# Altium PCB PCB1.PcbDoc
Units mm, origin at the board's own origin, x right, y up, seen from the top; angles counter-clockwise.
Board outline 89.97 x 121.9 mm, 2 copper layers (Top Layer, Bottom Layer); 59 components, 87 nets, 300 pads, 57 vias.
Unrouted connection lines stored in the file: 2.
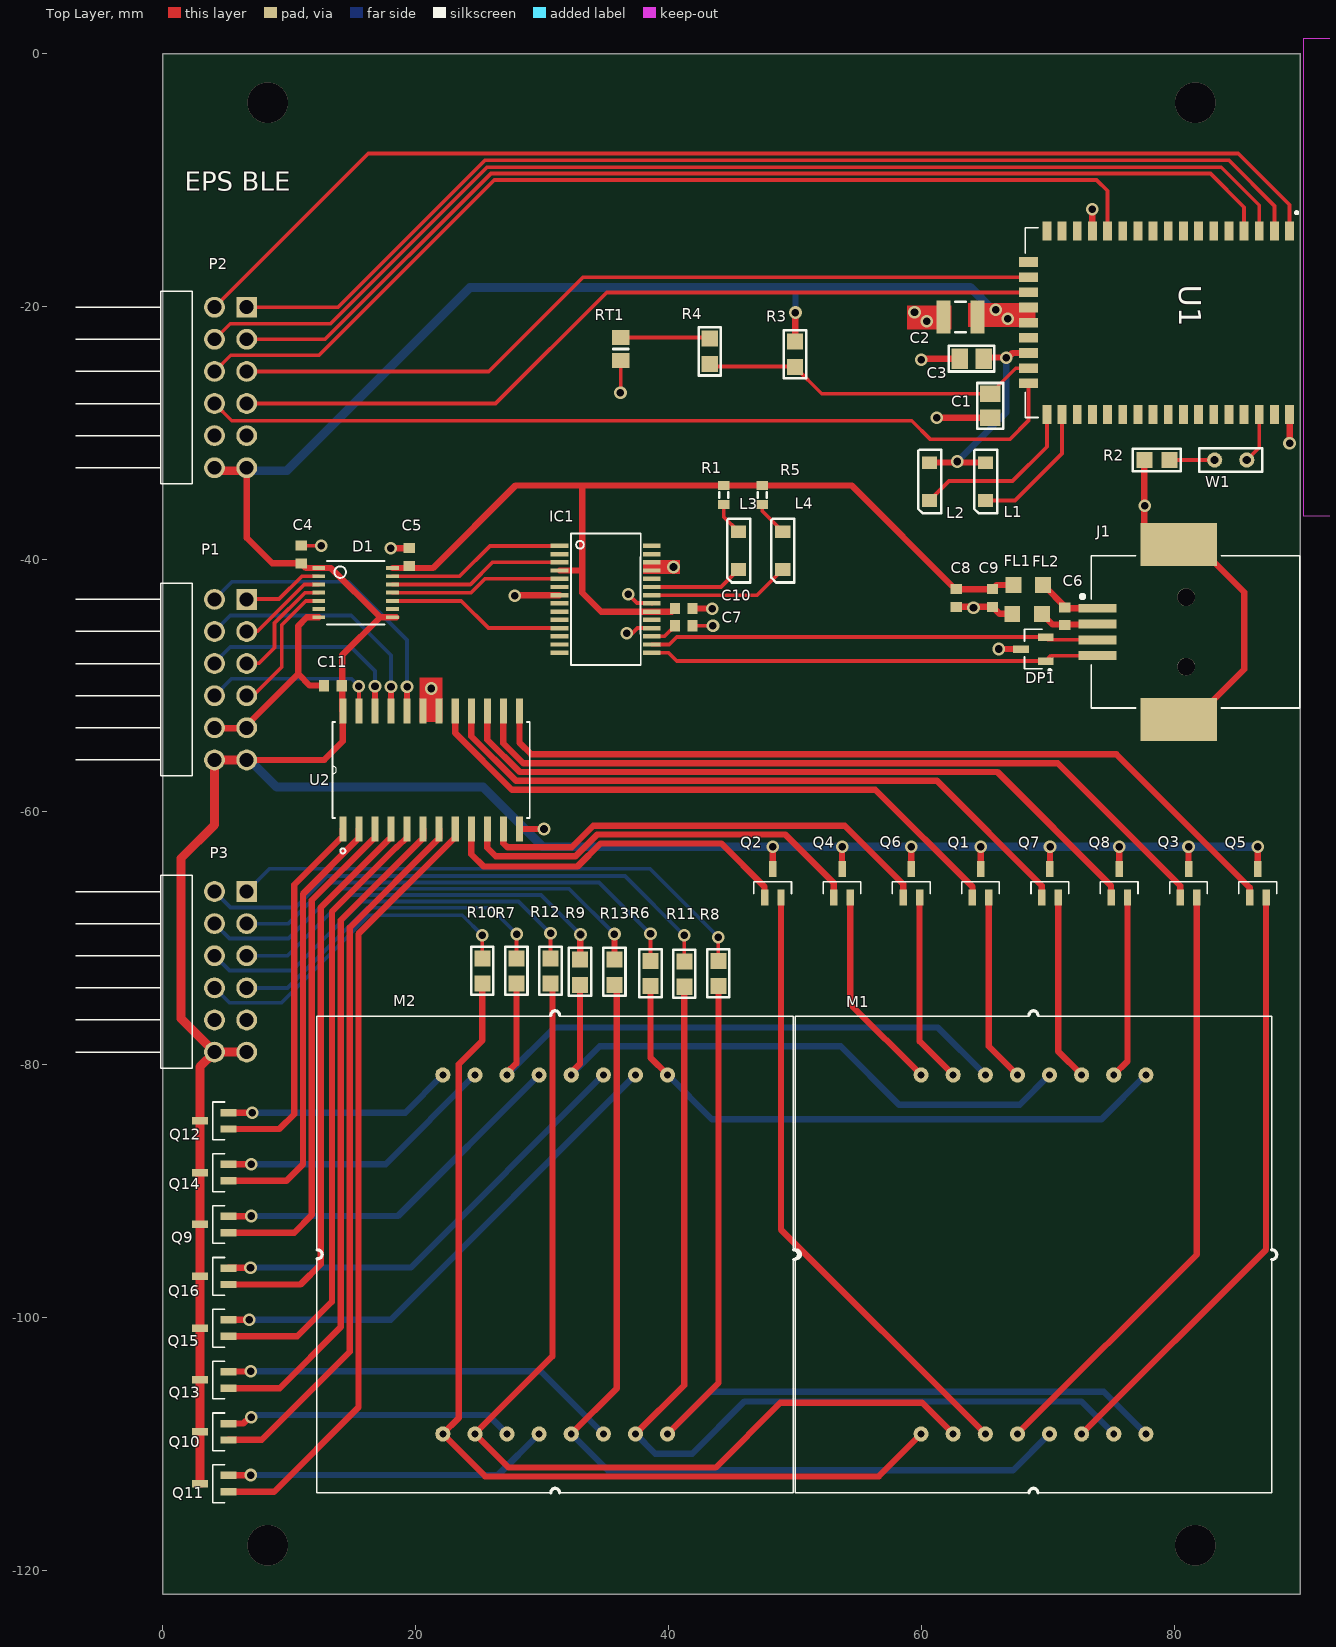
[diagram p0: Top Layer view]
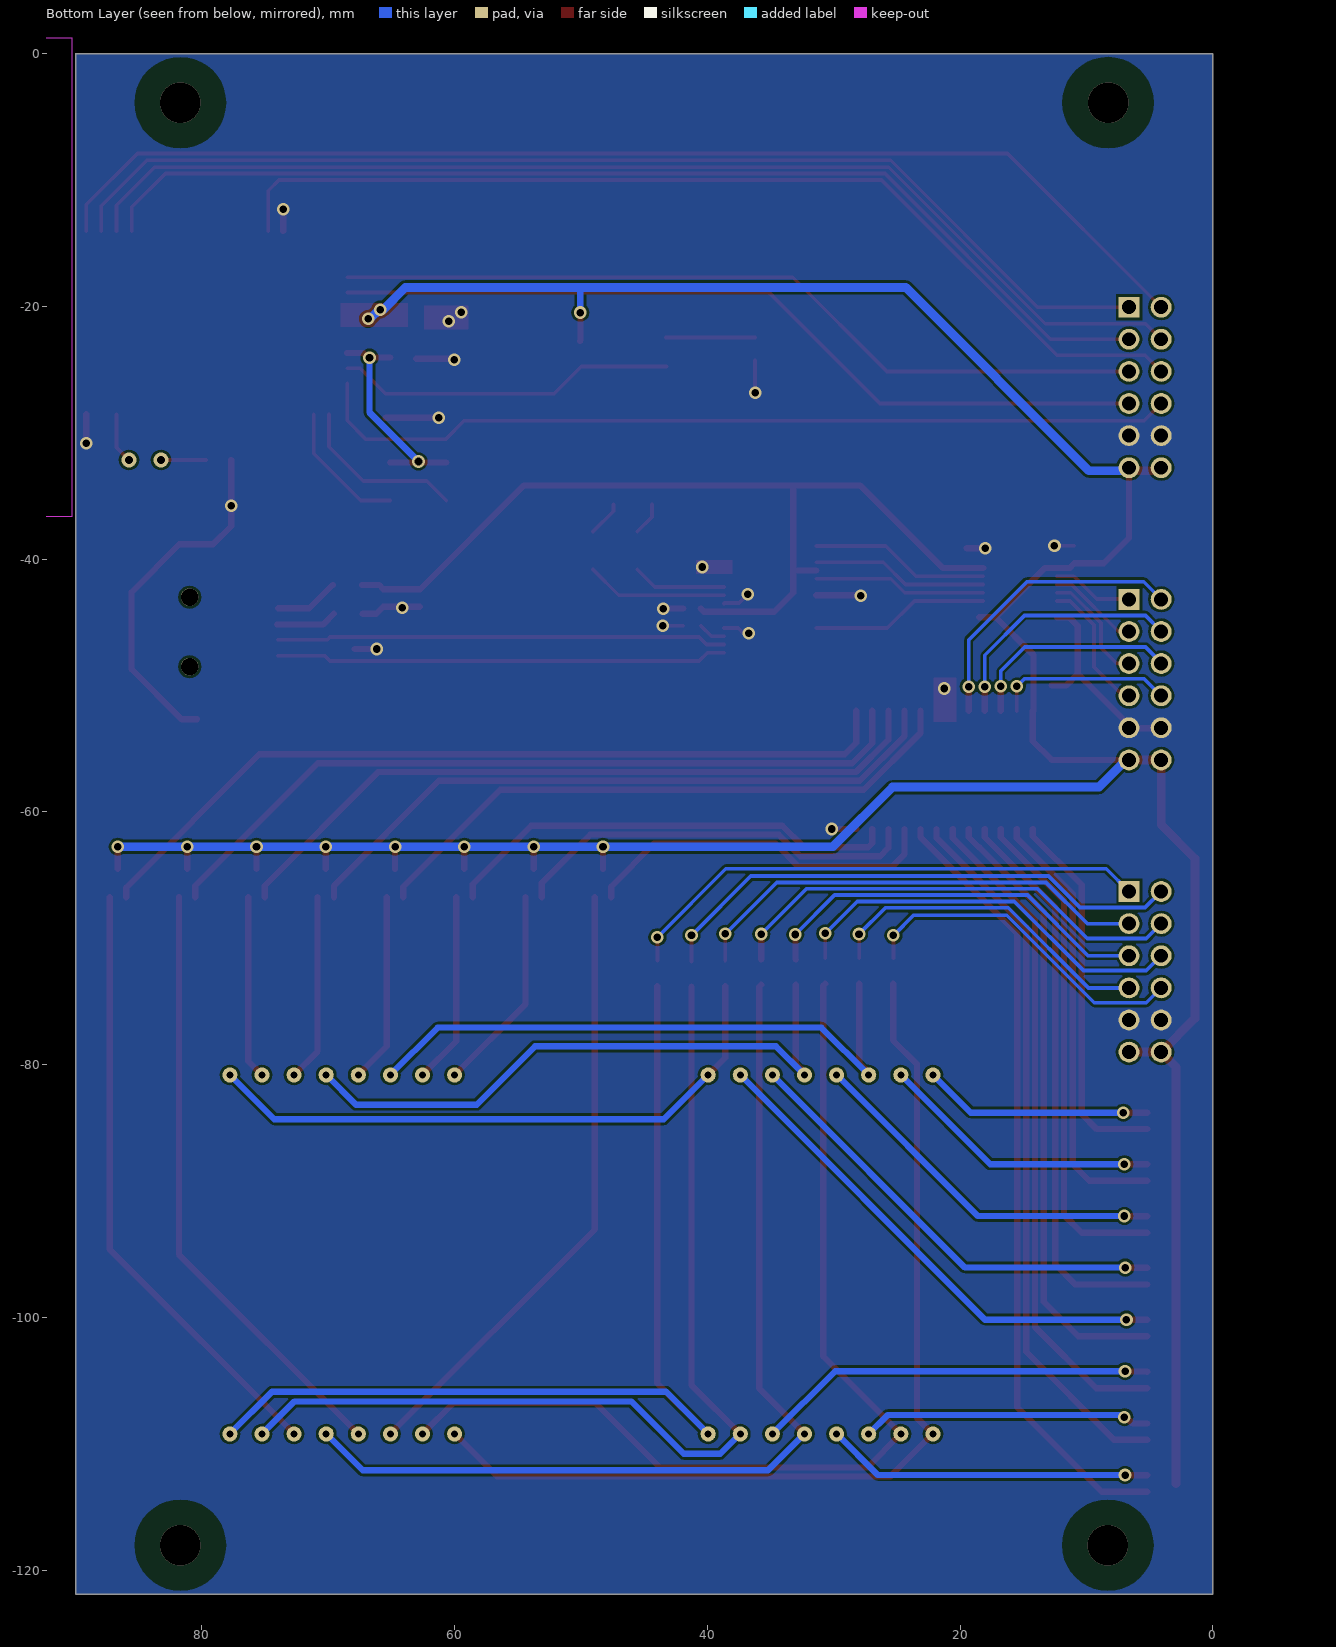
[diagram p1: Bottom Layer view, seen from below]

## Layer stack, top to bottom
Top Solder: solder mask 0.0102, Solder Resist, Dk 3.5
Top Layer: signal copper 0.0356
Dielectric 1: dielectric 0.32, FR-4, Dk 4.8
Bottom Layer: signal copper 0.0356
Bottom Solder: solder mask 0.0102, Solder Resist, Dk 3.5

## Board outline
0,-56.242 0,0 89.971,0 89.975,-0.004 89.975,-121.9 0.029,-121.9 0,-121.871
cut-out: 5.5,-121.925

## Design rules (kind name [scope] priority, off if disabled: settings)
Clearance Clearance_2 [InNamedPolygon('Ground') vs IsVia And AsMM(HoleDiameter) >= 3] p1: gap=0.254 ignorepadtopadclearanceinfootprint=FALSE except(0: Arc-Hole Track-Hole SMDPad-Hole THPad-Hole Via-Hole Fill-Hole Poly-Hole Region-Hole Text-Hole; 2: Via-Fill Via-Poly Via-Region)
Clearance Clearance_1 [OnLayer('Keep-Out Layer') vs OnLayer('Keep-Out Layer')] p2: gap=0 ignorepadtopadclearanceinfootprint=FALSE
Clearance [All And Not OnLayer('Keep-Out Layer') vs All And Not OnLayer('Keep-Out Layer')] p3: gap=0.2 ignorepadtopadclearanceinfootprint=FALSE
ComponentClearance ComponentClearance_1 [InComponent('M1') vs InComponent('M2')] p1: gap=-1 collisioncheckmode=3 verticalgap=0.254 showdistances=FALSE
ComponentClearance [All] p2: gap=0 collisioncheckmode=3 verticalgap=2540 showdistances=FALSE
HoleSize [All] p1: absolutevalues=TRUE maxlimit=3.2 minlimit=0.55 maxpercent=80.000 minpercent=20.000
MinimumSolderMaskSliver [All] p1: minsoldermaskwidth=0.05
PolygonConnect [All] p1: connectstyle=Direct reliefconductorwidth=0.5 reliefentries=4 polygonreliefangle="90 Angle" airgapwidth=0.2
RoutingVias [All] p1: holewidth=0.15 width=0.5 viastyle="Through Hole" minholewidth=0.1 minwidth=0.45 maxholewidth=0.25 maxwidth=0.6 viatemplateguid#1={1872E224-ECCF-4DE2-A86B-096BC1E742EF} viatemplatename#1=v127h71
SilkToSilkClearance [All] p1: silktosilkclearance=0.01
SilkToSolderMaskClearance [IsPad] p1: minsilkscreentomaskgap=0.01 clearancetoexposedcopper=TRUE
SolderMaskExpansion [All] p1: expansion=0.102
Width [All] p1: maxlimit=1 minlimit=0.3 preferedwidth=0.3 minimp=50.000000 maximp=50.000000 favimp=50.000000
25 further rules are at their usual default settings.

## Classes and differential pairs
net class "USB DATA": "D +" "D -"
net class UART: "CTS FT" "RTS FT" "RXD FT" "TXD FT"
net class "UART BM64": UART_RX UART_TX
net class "AUDIO I2S": ADCDAT BCLK DACDAT DACLRC
component class 3_DISPLAY: C11 M1 M2 P3 Q1 Q2 Q3 Q4 Q5 Q6 Q7 Q8 Q9 Q10 Q11 Q12 Q13 Q14 Q15 Q16 R6 R7 R8 R9 R10 R11 R12 R13 U2
component class 2_USB_UART: C4 C5 C6 C7 C8 C9 C10 D1 DP1 FL1 FL2 IC1 J1 L3 L4 P1 R1 R5
component class 1_BLE: C1 C2 C3 L1 L2 P2 R2 R3 R4 RT1 U1 W1

## Components (designator, comment, footprint, x,y, rotation, side; value= is the part's Value field where it differs from the comment)
C1 "1uF" Cap0805 65.454,-27.864 r90 top
C2 "Cap Semi" C1210 63.1,-20.846 r0 top value=22uF
C3 "0.1uF" Cap0805 63.979,-24.139 r180 top
C4 "Cap Semi" 1608[0603] 10.963,-39.631 r90 top value=100nF
C5 "Cap Semi" 1608[0603] 19.491,-39.826 r90 top value=100nF
C6 "Cap Semi" 1608[0603] 71.35,-44.519 r90 top value=10nF
C7 "Cap Semi" 1608[0603] 41.203,-45.275 r0 top value=100nF
C8 "Cap Semi" 1608[0603] 62.75,-43.069 r90 top value=10uF
C9 "Cap Semi" 1608[0603] 65.632,-43.069 r90 top value=100nF
C10 "Cap Semi" 1608[0603] 41.203,-43.903 r0 top value=100nF
C11 "Cap Semi" 1608[0603] 13.45,-50 r180 top value=100nF
D1 "TXB0104PWR" *TSSOP14 15.25,-42.65 r270 top
DP1 "PESD5V0U2BT,215" *SOT95P230X110-3N 68.865,-47.109 r180 top
FL1 "BLM21PG221SN1D" *BEADC2012X105N 68.464,-42.038 r0 top
FL2 "BLM21PG221SN1D" *BEADC2012X105N 68.374,-44.326 r0 top
IC1 "FT232RL" *SSOP28-LD 35.031,-43.175 r270 top
J1 "1-1734346-1" *TE_1-1734346-1_1-1734346-1(PRIMARY) 80.95,-45.752 r90 top
L1 "LED1" DIODE1206 65.077,-33.859 r90 top
L2 "LED1" DIODE1206 60.652,-33.859 r90 top
L3 "Led" "Diode1206 - PIN LETTER" 45.538,-39.321 r90 top
L4 "Led" "Diode1206 - PIN LETTER" 49.038,-39.321 r90 top
M1 "matrix8X8" "Matrix Led" 68.875,-95 r0 top
M2 "matrix8X8" "Matrix Led" 31.038,-95 r0 top
P1 "Pmod male" 901220766 0.275,-49.53 r270 top
P2 "Pmod male" 901220766 0.275,-26.416 r270 top
P3 "Pmod male" 901220766 0.275,-72.644 r270 top
Q1 "MOSFET-P" BSS84PWH6327XTSA1 64.046,-66.75 r90 top
Q2 "MOSFET-P" BSS84PWH6327XTSA1 47.6,-66.75 r90 top
Q3 "MOSFET-P" BSS84PWH6327XTSA1 80.493,-66.75 r90 top
Q4 "MOSFET-P" BSS84PWH6327XTSA1 53.082,-66.75 r90 top
Q5 "MOSFET-P" BSS84PWH6327XTSA1 85.975,-66.75 r90 top
Q6 "MOSFET-P" BSS84PWH6327XTSA1 58.564,-66.75 r90 top
Q7 "MOSFET-P" BSS84PWH6327XTSA1 69.529,-66.75 r90 top
Q8 "MOSFET-P" BSS84PWH6327XTSA1 75.011,-66.75 r90 top
Q9 "MOSFET-P" BSS84PWH6327XTSA1 5.183,-93.279 r180 top
Q10 "MOSFET-P" BSS84PWH6327XTSA1 5.183,-109.679 r180 top
Q11 "MOSFET-P" BSS84PWH6327XTSA1 5.183,-113.779 r180 top
Q12 "MOSFET-P" BSS84PWH6327XTSA1 5.183,-85.079 r180 top
Q13 "MOSFET-P" BSS84PWH6327XTSA1 5.183,-105.579 r180 top
Q14 "MOSFET-P" BSS84PWH6327XTSA1 5.183,-89.179 r180 top
Q15 "MOSFET-P" BSS84PWH6327XTSA1 5.183,-101.479 r180 top
Q16 "MOSFET-P" BSS84PWH6327XTSA1 5.183,-97.379 r180 top
R1 "270R" J1-0603 44.375,-34.925 r90 top value=270
R2 "Res3" "Resistor 0805" 78.648,-32.153 r180 top value=4K7
R3 "Res3" "RESISTOR 0805" 50.011,-23.797 r90 top value=1M
R4 "Res3" "RESISTOR 0805" 43.264,-23.544 r270 top value=86.6K
R5 "270R" J1-0603 47.425,-34.925 r90 top value=270
R6 "270R" "Resistor 0805" 38.575,-72.775 r90 top value=220
R7 "270R" "Resistor 0805" 27.971,-72.575 r90 top value=220
R8 "270R" "Resistor 0805" 43.95,-72.775 r90 top value=220
R9 "270R" "Resistor 0805" 33.004,-72.675 r90 top value=220
R10 "270R" "Resistor 0805" 25.275,-72.575 r90 top value=220
R11 "270R" "Resistor 0805" 41.25,-72.825 r90 top value=220
R12 "270R" "Resistor 0805" 30.668,-72.575 r90 top value=220
R13 "270R" "Resistor 0805" 35.725,-72.675 r90 top value=220
RT1 "Res Thermal" 6-0805_N 36.229,-23.374 r270 top
U1 "BM64SPKS1MC1-0001AA" *MODULE_BM64SPKS1MC1-0001AA 68.235,-13.793 r270 top
U2 "CD74HC154M" *SOIC127P1030X265-24N 21.225,-56.675 r90 top
W1 "Jumper" "SHUNT JUMPER" 83.208,-32.153 r0 top

## Footprints (in the part's own frame and the unit in brackets; to place one, negate y for a bottom-side part, rotate by r counter-clockwise, add the part's x,y. Pads: shape width x height; smd on the part's side, far side on the other; paste and mask are expansions set on the pad)
6-0805_N [mm] "Chip Resistor, Body 2.0x1.2mm, IPC Medium Density"
  rect 1.2x1.4 smd: 1(-0.9,0) 2(0.9,0)
  silkscreen extent 0,-0.6 0,0.6, body extent -1.07,-0.7 1.07,0.7, height 0.7
1608[0603] [mm] "Chip Capacitor, Body 1.6x0.8mm, IPC High Density"
  rect 0.8x0.9 smd: 1(-0.7,0) 2(0.7,0)
  body extent -0.87,-0.48 0.87,0.48, height 1.3
901220766 [mm]
  rect 1.65x1.65 hole 1.1: 1(-6.35,6.357)
  round 1.65 hole 1.1: 2(-3.81,6.357) 3(-1.27,6.357) 4(1.27,6.357) 5(3.81,6.357) 6(6.35,6.357) 7(-6.35,3.817) 8(-3.81,3.817) 9(-1.27,3.817) 10(1.27,3.817) 11(3.81,3.817) 12(6.35,3.817)
  silkscreen extent -7.62,-7.18 7.62,2.07, body extent -7.62,-7.7 7.62,6.15, height 3.08
*BEADC2012X105N [mm]
  rect 1.25x1.25 smd: 1(-1.175,0) 2(1.175,0)
*MODULE_BM64SPKS1MC1-0001AA [mm]
  rect 1.5x0.7 smd: 1(0.25,20.9) 2(0.25,19.7) 3(0.25,18.5) 4(0.25,17.3) 5(0.25,16.1) 6(0.25,14.9) 7(0.25,13.7) 8(0.25,12.5) 9(0.25,11.3) 10(0.25,10.1) 11(0.25,8.9) 12(0.25,7.7) 13(0.25,6.5) 14(0.25,5.3) 15(0.25,4.1) 16(0.25,2.9) 17(0.25,1.7) 27(14.75,1.7) 28(14.75,2.9) 29(14.75,4.1) 30(14.75,5.3) 31(14.75,6.5) 32(14.75,7.7) 33(14.75,8.9) 34(14.75,10.1) 35(14.75,11.3) 36(14.75,12.5) 37(14.75,13.7) 38(14.75,14.9) 39(14.75,16.1) 40(14.75,17.3) 41(14.75,18.5) 42(14.75,19.7) 43(14.75,20.9)
  rect 0.76x1.5 smd: 18(2.7,0.25) 19(3.9,0.25) 20(5.1,0.25) 21(6.3,0.25) 22(7.5,0.25) 23(8.7,0.25) 24(9.9,0.25) 25(11.1,0.25) 26(12.3,0.25)
  Keep-Out Layer region: -15,44 22.8,44 22.8,22 12.827,22 9.271,22 -15,22
  silkscreen extent -1.3,0 15,21.55
*SOIC127P1030X265-24N [mil]
  rect 78x22 smd: 1(-184,275) 2(-184,225) 3(-184,175) 4(-184,125) 5(-184,75) 6(-184,25) 7(-184,-25) 8(-184,-75) 9(-184,-125) 10(-184,-175) 11(-184,-225) 12(-184,-275) 13(184,-275) 14(184,-225) 15(184,-175) 16(184,-125) 17(184,-75) 18(184,-25) 19(184,25) 20(184,75) 21(184,125) 22(184,175) 23(184,225) 24(184,275)
  silkscreen extent -260,-307 150,307, body extent -204,-303 202,303, height 91
*SOT95P230X110-3N [mm]
  rect 1.26x0.59 smd: 1(-0.98,0.95) 2(-0.98,-0.95) 3(0.98,0)
  silkscreen extent -1.4,-1.56 0.7,1.8
*SSOP28-LD [mm]
  rect 0.348x1.397 smd: 1(-4.225,-3.656) 2(-3.575,-3.656) 3(-2.925,-3.656) 4(-2.275,-3.656) 5(-1.625,-3.656) 6(-0.975,-3.656) 7(-0.325,-3.656) 8(0.325,-3.656) 9(0.975,-3.656) 10(1.625,-3.656) 11(2.275,-3.656) 12(2.925,-3.656) 13(3.575,-3.656) 14(4.225,-3.656) 15(4.225,3.656) 16(3.575,3.656) 17(2.925,3.656) 18(2.275,3.656) 19(1.625,3.656) 20(0.975,3.656) 21(0.325,3.656) 22(-0.325,3.656) 23(-0.975,3.656) 24(-1.625,3.656) 25(-2.275,3.656) 26(-2.925,3.656) 27(-3.575,3.656) 28(-4.225,3.656)
  silkscreen extent -5.2,-2.75 5.2,2.78
*TE_1-1734346-1_1-1734346-1(PRIMARY) [mm]
  rect 0.7x3 smd: 1(1.87,7) 2(-0.63,7) 3(-1.88,7) 4(0.62,7)
  round 1.4 hole 1.4 unplated: None(-2.75,0) None(2.75,0)
  rect 3.4x6.04 smd: SH1(6.92,0.58) SH2(-6.92,0.58)
  silkscreen extent -6.02,-9 6.02,8.34, body extent -8.35,-8.83 8.15,8.27, height 11.2
*TSSOP14 [mil]
  rect 12x39 smd: 1(-76.77,-114.87) 2(-51.18,-114.87) 3(-25.59,-114.87) 4(0,-114.87) 5(25.59,-114.87) 6(51.18,-114.87) 7(76.77,-114.87) 8(76.77,114.87) 9(51.18,114.87) 10(25.59,114.87) 11(0,114.87) 12(-25.59,114.87) 13(-51.18,114.87) 14(-76.77,114.87)
  silkscreen extent -99,-90 99,90
BSS84PWH6327XTSA1 [mm]
  rect 1.26x0.59 smd: 1(0,0) 2(0,-1.3) 3(2.25,-0.65)
  silkscreen extent 0.3,-2.13 1.22,0.85
C1210 [mm] "Chip Capacitor, Body 3.2x2.5mm, IPC High Density"
  rect 1.1x2.6 smd: 1(-1.35,0) 2(1.35,0)
  silkscreen extent -0.4,-1.2 0.4,1.2, body extent -1.7,-1.35 1.7,1.35, height 1.3
Cap0805 [mm]
  rect 1.3x1.6 smd: 1(-0.95,0) 2(0.95,0)
  silkscreen extent -1.8,-1.02 1.8,1.02, body extent -1.4,-0.62 1.4,0.63, height 0.8
DIODE1206 [mm]
  rect 1x1.2 smd: 1(1.5,0) 2(-1.5,0)
  silkscreen extent -2.52,-0.92 2.52,0.9
"Diode1206 - PIN LETTER" [mm]
  rect 1x1.2 smd: A(1.5,0) K(-1.5,0)
  silkscreen extent -2.52,-0.92 2.52,0.9
J1-0603 [mm] "Chip Resistor, Body 1.6x0.8mm, IPC High Density"
  rect 0.7x0.9 smd: 1(-0.75,0) 2(0.75,0)
  silkscreen extent -0.2,-0.35 0.2,0.35, body extent -0.85,-0.48 0.85,0.48, height 0.9
"Matrix Led" [mm]
  round 1.2 hole 0.55: 1(-8.89,-14.2) 2(-6.35,-14.2) 3(-3.81,-14.2) 4(-1.27,-14.2) 5(1.27,-14.2) 6(3.81,-14.2) 7(6.35,-14.2) 8(8.89,-14.2) 9(-8.89,14.2) 10(-6.35,14.2) 11(-3.81,14.2) 12(-1.27,14.2) 13(1.27,14.2) 14(3.81,14.2) 15(6.35,14.2) 16(8.89,14.2)
  silkscreen extent -18.85,-18.85 19.24,19.27
"Resistor 0805" [mm]
  rect 1.27x1.27 smd: 1(-1,0) 2(1,0)
  silkscreen extent -1.88,-0.87 1.92,0.87
"RESISTOR 0805" [mm]
  rect 1.27x1.27 smd: 1(-1,0) 2(1,0)
  silkscreen extent -1.88,-0.87 1.92,0.87
"SHUNT JUMPER" [mm]
  round 1.2 hole 0.64: 1(0,0) 2(2.54,0)
  silkscreen extent -1.23,-0.92 3.77,0.92

## Part data
C1 C3: library part Cap, "capacitor", ASiD Part Number=C-AS, Volte=25v, ClassName=OutBuck
C2 C4 C5 C6 C7 C8 C9 C10 C11: "Capacitor (Semiconductor SIM Model)", LatestRevisionDate=29-May-2009, LatestRevisionNote="IPC-7351 Footprint Added.", PackageDescription="Chip Capacitor", PackageReference=C1206, Published=8-Jun-2000, Publisher="Altium Limited"
D1: "4-Bit Bidirectional Voltage-Level Shifter with Auto Direction Sensing and +/-15 kV ESD Protect 14-TSSOP -40 to 85", Package="TSSOP-14 Texas Instruments", Availability=Unavailable, Digi-KeyReference=296-21929-1-ND, MF="Texas Instruments", MP=TXB0104PWR, Price=None, SnapEDA_Link=https://www.snapeda.com/parts/TXB0104PWR/Texas%20Instruments/view-part/?ref=snap
DP1: "TVS DIODE 5V SOT23", Manufacturer 1=Nexperia, Supplier Part Number 1=1727-3936-1-ND, ComponentLink1Description=https://assets.nexperia.com/documents/data-sheet/PESD5V0U2BT.pdf?src-supplier=Digi-Key, ComponentLink1URL=https://assets.nexperia.com/documents/data-sheet/PESD5V0U2BT.pdf?src-supplier=Digi-Key, Digi-KeyReference=1727-3936-1-ND, Manufacturer Part Number 1=PESD5V0U2BT,215, Pricing 1="1=0,44000, 10=0,35300, 100=0,24020, 500=0,18012, 1000=0,13510 (USD)", RoHS=No, Stock 1=61061, Supplier 1=Digi-Key
FL1 FL2: "220 Ohms @ 100MHz 1 Power Line Ferrite Bead 0805 (2012 Metric) 2A 45mOhm", Package="2012 Murata", Digi-Key_Part_Number=490-1054-1-ND, MF=Murata, MP=BLM21PG221SN1D, SnapEDA_Link=https://www.snapeda.com/parts/BLM21PG221SN1D/Murata/view-part/12270/?ref=snap
IC1: "USB-to-UART 1-CH 256Byte FIFO 5V 28-Pin SSOP", Package="SSOP-28 FTDI, Future", Availability=Unavailable, Digi-KeyReference=768-1007-1-ND, MF="FTDI, Future", MP=FT232RL, Price=None, SnapEDA_Link=https://www.snapeda.com/parts/FT232RL/FTDI%2C%20Future%20Technology%20Devices%20International%20Ltd/view-part/?ref=snap
J1: "Conn USB 2.0 Type B RCP 4 POS 1.25mm Solder RA SMD 4 Terminal 1 Port T/R", Package=None, Digi-Key_Part_Number=A110862CT-ND, DigiKey-Purchase-URL=https://snapeda.com/shop?store=DigiKey&id=512451, EU_RoHS_Compliance=Compliant, MF="TE Connectivity", MP=1-1734346-1, SnapEDA_Link=https://www.snapeda.com/parts/1-1734346-1/TE%20Connectivity%20AMP%20Connectors/view-part/512451/?ref=snap
L1 L2: "Typical RED GaAs LED", Digi-KeyReference=732-13395-1-ND, LatestRevisionDate=08-Jul-2005, LatestRevisionNote="Mech Layer 1 removed.", PackageDescription="LED; 2 Leads", PackageReference=LED-1, Published=8-Jun-2000, Publisher="Altium Limited"
P1 P2 P3: "p mod male 6 position 2 rows"
Q1 Q2 Q3 Q4 Q5 Q6 Q7 Q8 Q9 Q10 Q11 Q12 Q13 Q14 Q15 Q16: "P-Channel MOSFET", Digi-KeyReference=BSS84PWH6327XTSA1CT-ND, LatestRevisionDate=17-Jul-2002, LatestRevisionNote="Re-released for DXP Platform.", PackageDescription="TO, Flat Index; 3 In-Line, Axial Leads; Body Dia. 4.6mm; Lead Dia. 0.5 mm (max)", PackageReference=E3, PackageVersion=1995/1996, Published=8-Jun-2000, Publisher="Altium Limited"
R1 R5 R6 R7 R8 R9 R10 R11 R12 R13: library part Res3, "Resistor", LatestRevisionDate=29-May-2009, LatestRevisionNote="IPC-7351 Footprint Added.", PackageDescription="Chip Resistor", PackageReference=J1-0603, Published=8-Jun-2000, Publisher="Altium Limited"
R2 R3 R4: "Resistor", LatestRevisionDate=29-May-2009, LatestRevisionNote="IPC-7351 Footprint Added.", PackageDescription="Chip Resistor", PackageReference=J1-0603, Published=8-Jun-2000, Publisher="Altium Limited"
RT1: "Thermistor", Code_IPC=RESC2012, Digi-KeyReference=BC2562CT-ND, LatestRevisionDate=29-May-2009, LatestRevisionNote="IPC-7351 Footprint Added.", PackageDescription="Chip Resistor 0805 Case Size", PackageReference=6-0805, PackageVersion=Mar-2003, Published=24-Mar-1999, Publisher="Altium Limited", R at 25=100k
U1: "Bluetooth Bluetooth v5.0 Transceiver Module 2.4GHz Integrated, Trace Surface Mount", Package="Module Microchip", Availability=Unavailable, MF=Microchip, MP=BM64SPKS1MC1-0001AA, Price=None, SnapEDA_Link=https://www.snapeda.com/parts/BM64SPKS1MC1-0001AA/Microchip/view-part/613145/?ref=snap
U2: "Decoder/Demultiplexer 1 x 4:16 24-SOIC", Package="SOIC-24 Texas Instruments", Availability=Unavailable, Digi-KeyReference=296-24352-2-ND, MF="Texas Instruments", MP=CD74HC154M, Price=None, SnapEDA_Link=https://www.snapeda.com/parts/CD74HC154M/Texas%20Instruments/view-part/231174/?ref=snap
W1: "Jumper Wire", Digi-KeyReferencer=S9000-ND, LatestRevisionDate=17-Jul-2002, LatestRevisionNote="Re-released for DXP Platform.", PackageDescription="Radial Cap, Thru-Hole; 2 Leads; 0.2 in Pin Spacing", PackageReference=RAD-0.2, Published=24-Mar-1999, Publisher="Altium Limited"
L3 L4: Digi-KeyReference=732-13395-1-ND

## Via types
v1: diameter 1, hole 0.6, Top Layer to Bottom Layer, 53 vias
v2: diameter 3.2, hole 3.2, Top Layer to Bottom Layer, 3 vias
v3: diameter 3.2/3.2 (per signal layer), hole 3.2, Top Layer to Bottom Layer, 1 vias

## Nets (pads, with @x,y where several pads share a name; then routed paths per layer and width w, separated by ;. In a path a pad name is that pad's centre, name@x,y a point inside that pad or via, vN(x,y) a via of type N, cw(c..) or ccw(c..) an arc to the next point about the centre after c; other vN are vias at no path point)
"3.3 VCC": C2.2 C4.1 C11.1 D1.1 D1.8 P1.6 P1.12 P2.6 P2.12 P3.6 P3.12 Q1.3 Q2.3 Q3.3 Q4.3 Q5.3 Q6.3 Q7.3 Q8.3 Q9.3 Q10.3 Q11.3 Q12.3 Q13.3 Q14.3 Q15.3 Q16.3 R3.2 U1.21 U1.22 U2.24 | length 273.9
  Top Layer w0.5: P1.6 12.762,-55.88 14.24,-54.402 U2.24 ; P2.6@6.632,-33 6.632,-38.32 8.644,-40.331 C4.1 11.329,-40.698 12.33,-40.698 D1.1 13.292,-40.7 17.184,-44.592 14.195,-47.581 14.195,-50 14.195,-52.015 U2.24@14.211,-52.031 ; 17.192,-44.6 D1.8 D1.8@18.472,-44.6 ; Q2.3 v1(48.25,-62.746) ; v1(50.044,-20.492) 50.027,-20.508 50.027,-22.702 R3.2@50.067,-22.741 ; Q4.3 v1@53.732,-62.847 ; Q6.3 v1@59.214,-62.979 ; Q1.3 v1@64.696,-63.07 ; Q7.3 70.182,-64.497 70.182,-62.749 v1(70.185,-62.746) ; Q8.3 v1@75.661,-62.905 ; Q3.3 v1@81.143,-63.06 ; Q5.3 v1(86.625,-62.746) v1@86.625,-62.737
  Top Layer w0.7: Q11.3 Q10.3 Q13.3 Q15.3 Q16.3 Q9.3 Q14.3 Q12.3 2.933,-80.153 P3.12 ; P2.12@4.092,-33 P2.6@6.632,-33 ; P3.6 P3.12 ; P1.6 P1.12 4.092,-61.014 1.429,-63.677 1.429,-76.331 P3.12
  Bottom Layer w0.5: v1(50.044,-20.492) 50.044,-18.623 50.17,-18.497
  Bottom Layer w0.7: P1.6@6.632,-55.86 6.846,-55.86 9.018,-58.031 25.349,-58.031 30.064,-62.746 v1(48.25,-62.746) v1(53.732,-62.746) ; P2.6@6.632,-33 9.808,-33 24.31,-18.497 50.17,-18.497 63.875,-18.497 65.636,-20.258 v1(65.881,-20.258) 65.962,-20.258 66.64,-20.936 66.774,-20.936 v1(66.831,-20.993) ; v1(53.732,-62.746) v1(59.214,-62.746) v1(64.696,-62.746) v1(70.185,-62.746) v1(75.661,-62.746) v1(81.143,-62.746) v1(86.625,-62.746)
"5 VCC": C5.1 C8.2 C9.2 C10.1 D1.14 FL1.1 IC1.4 IC1.20 R1.2 R5.2 | length 73.9
  Top Layer w0.5: D1.14 C5.1@19.317,-40.7 ; 19.016,-40.701 21.376,-40.701 27.902,-34.175 33.173,-34.175 ; IC1.4 33.067,-40.9 ; C10.1 40.256,-44.15 IC1.20 34.691,-44.15 33.189,-42.647 33.189,-34.191 33.173,-34.175 ; FL1.1 65.963,-42.038 C9.2 C8.2 62.7,-42.369 54.506,-34.175 R5.2 R1.2 33.173,-34.175
"5V USB": C6.2 FL1.2 J1.1 | length 5.1
  Top Layer w0.5: FL1.2 71.483,-43.882 J1.1
A0: P1.10 U2.23 | length 14.1
  Top Layer w0.3: U2.23 v1(15.51,-50.06)
  Bottom Layer w0.3: P1.10@4.127,-50.78 5.443,-49.464 14.914,-49.464 v1(15.51,-50.06)
A1: P1.9 U2.22 | length 17.2
  Top Layer w0.5: U2.22 v1(16.78,-50.057)
  Bottom Layer w0.3: P1.9@4.058,-48.226 5.332,-46.951 14.888,-46.951 16.78,-48.843 v1(16.78,-50.057)
A2: P1.8 U2.21 | length 20.2
  Top Layer w0.5: U2.21 v1(18.05,-50.082)
  Bottom Layer w0.3: P1.8@4.092,-45.7 5.338,-44.454 14.902,-44.454 18.05,-47.603 v1(18.05,-50.082)
A3: P1.7 U2.20 | length 23.3
  Top Layer w0.5: U2.20 v1(19.32,-50.079)
  Bottom Layer w0.3: P1.7@4.082,-43.17 5.471,-41.781 14.698,-41.781 19.32,-46.403 v1(19.32,-50.079)
ADCDAT: P2.7 U1.1 | length 93.8
  Top Layer w0.3: P2.7 16.253,-7.905 85.071,-7.905 89.135,-11.969 U1.1
AMB_DET: C1.2 R3.1 R4.2 U1.25 | length 27
  Top Layer w0.3: R4.2@43.207,-24.747 49.961,-24.747 R3.1 52.128,-26.914 C1.2 67.475,-24.893 U1.25
BCLK: P2.8 U1.3 | length 91.6
  Top Layer w0.3: P2.8 5.326,-21.372 13.268,-21.372 25.646,-8.994 83.733,-8.994 86.735,-11.996 U1.3
BT_WAKE_UP: P2.10 U1.26 | length 69.1
  Top Layer w0.3: P2.10 5.457,-29.051 59.248,-29.051 60.718,-30.521 66.997,-30.521 68.485,-29.033 U1.26
CO1: M1.12 Q1.2 | length 15
  Top Layer w0.5: Q1.2 65.346,-78.541 M1.12
CO2: M1.3 Q2.2 | length 49.1
  Top Layer w0.5: Q2.2 48.9,-93.035 M1.3
CO3: M1.4 Q3.2 | length 48.3
  Top Layer w0.5: M1.4 81.793,-95.012 Q3.2
CO4: M1.9 Q4.2 | length 16.4
  Top Layer w0.5: Q4.2 54.382,-75.197 M1.9
CO5: M1.6 Q5.2 | length 48.5
  Top Layer w0.5: M1.6 87.275,-94.61 Q5.2
CO6: M1.10 Q6.2 | length 15.2
  Top Layer w0.5: Q6.2 59.864,-78.139 M1.10
CO7: M1.14 Q7.2 | length 14.8
  Top Layer w0.5: Q7.2 70.829,-78.944 M1.14
CO8: M1.15 Q8.2 | length 14.5
  Top Layer w0.5: M1.15 76.311,-79.714 Q8.2
CO11: M2.12 Q9.2 | length 29.2
  Top Layer w0.5: Q9.2 6.987,-91.979 v1(7.005,-91.961)
  Bottom Layer w0.5: v1(7.005,-91.961) 18.607,-91.961 M2.12
CO22: M2.3 Q10.2 | length 22.9
  Top Layer w0.5: Q10.2 6.364,-108.379 6.87,-107.874 v1(7.005,-107.874)
  Bottom Layer w0.5: v1(7.005,-107.874) 7.177,-107.702 25.73,-107.702 M2.3
CO33: M2.4 Q11.2 | length 25.9
  Top Layer w0.5: Q11.2 5.196,-112.466 6.937,-112.466 v1(6.95,-112.453)
  Bottom Layer w0.5: v1(6.95,-112.453) 26.515,-112.453 M2.4
CO44: M2.9 Q12.2 | length 18.2
  Top Layer w0.5: Q12.2 5.185,-83.781 7.077,-83.781 v1(7.079,-83.783)
  Bottom Layer w0.5: v1(7.079,-83.783) 19.165,-83.783 M2.9
CO55: M2.6 Q13.2 | length 31.7
  Top Layer w0.5: Q13.2 5.204,-104.258 6.929,-104.258 v1(6.95,-104.237)
  Bottom Layer w0.5: v1(6.95,-104.237) 29.885,-104.237 M2.6
CO66: M2.10 Q14.2 | length 22.4
  Top Layer w0.5: Q14.2 5.192,-87.871 6.996,-87.871 v1(7.005,-87.862)
  Bottom Layer w0.5: v1(7.005,-87.862) 17.626,-87.862 M2.10
CO77: M2.14 Q16.2 | length 36
  Top Layer w0.5: Q16.2 5.202,-96.06 6.912,-96.06 v1(6.931,-96.041)
  Bottom Layer w0.5: v1(6.931,-96.041) 19.607,-96.041 M2.14
CO88: M2.15 Q15.2 | length 40.2
  Top Layer w0.5: Q15.2 5.194,-100.168 6.828,-100.168 v1(6.839,-100.157)
  Bottom Layer w0.5: v1(6.839,-100.157) 18.031,-100.157 M2.15
CTS: D1.5 P1.4 | length 10.7
  Top Layer w0.3: P1.4 7.122,-50.8 9.401,-48.521 9.401,-45.205 11.306,-43.3 D1.5
"CTS FT": D1.10 IC1.11 | length 14.1
  Top Layer w0.3: D1.10 23.606,-43.3 25.756,-45.45 IC1.11
"D +": DP1.1 IC1.15 J1.3 | length 35.7
  Top Layer w0.3: IC1.15 39.99,-47.4 40.649,-48.059 DP1.1 70.272,-47.632 J1.3
"D -": DP1.2 IC1.16 J1.2 | length 35.6
  Top Layer w0.3: IC1.16 40.062,-46.75 40.653,-46.159 DP1.2 70.068,-46.382 J1.2
DACDAT: P2.2 U1.4 | length 87.3
  Top Layer w0.3: P2.2 12.837,-22.606 25.949,-9.494 82.869,-9.494 85.535,-12.16 U1.4
DACLRC: P2.1 U1.2 | length 89.6
  Top Layer w0.3: P2.1 13.867,-20.066 25.487,-8.446 84.332,-8.446 87.935,-12.049 U1.2
EN0: Q1.1 U2.17 | length 48.5
  Top Layer w0.5: U2.17 23.13,-53.753 27.615,-58.238 56.368,-58.238 64.046,-65.916 Q1.1
EN1: Q2.1 U2.9 | length 28.6
  Top Layer w0.5: U2.9 24.4,-63.337 25.379,-64.316 32.804,-64.316 34.633,-62.487 44.187,-62.487 47.6,-65.9 Q2.1
EN2: Q3.1 U2.14 | length 61.7
  Top Layer w0.5: U2.14 26.94,-54.554 28.524,-56.138 70.806,-56.138 80.493,-65.825 Q3.1
EN3: Q4.1 U2.10 | length 32.6
  Top Layer w0.5: U2.10 25.67,-62.831 26.328,-63.489 32.641,-63.489 34.343,-61.787 49.256,-61.787 53.082,-65.613 Q4.1
EN4: Q5.1 U2.13 | length 65.8
  Top Layer w0.5: U2.13 28.21,-54.519 29.129,-55.438 75.435,-55.438 85.975,-65.978 Q5.1
EN5: Q6.1 U2.11 | length 36.5
  Top Layer w0.5: U2.11 26.94,-62.468 27.261,-62.789 32.351,-62.789 34.054,-61.087 53.937,-61.087 58.564,-65.714 Q6.1
EN6: Q7.1 U2.16 | length 53
  Top Layer w0.5: U2.16 24.4,-54.003 27.935,-57.538 61.242,-57.538 69.529,-65.825 Q7.1
EN7: Q8.1 U2.15 | length 57.3
  Top Layer w0.5: U2.15 25.67,-54.274 28.234,-56.838 66.024,-56.838 75.011,-65.825 Q8.1
EN8: Q9.1 U2.3 | length 39.8
  Top Layer w0.5: Q9.1 10.388,-93.279 11.783,-91.884 11.783,-66.982 16.78,-61.985 U2.3
EN9: Q10.1 U2.7 | length 56.8
  Top Layer w0.5: Q10.1 5.203,-109.659 7.824,-109.659 14.777,-102.707 14.777,-69.143 21.86,-62.06 U2.7
EN10: Q11.1 U2.8 | length 62
  Top Layer w0.5: Q11.1 8.8,-113.779 15.48,-107.099 15.48,-69.647 23.13,-61.997 U2.8
EN11: Q12.1 U2.1 | length 29.8
  Top Layer w0.5: Q12.1 9.206,-85.079 10.383,-83.902 10.383,-65.766 14.24,-61.909 U2.1
EN12: Q13.1 U2.6 | length 53
  Top Layer w0.5: Q13.1 9.24,-105.579 14.077,-100.742 14.077,-68.573 20.59,-62.06 U2.6
EN13: Q14.1 U2.2 | length 34.8
  Top Layer w0.5: Q14.1 9.779,-89.179 11.083,-87.875 11.083,-66.487 15.51,-62.06 U2.2
EN14: Q16.1 U2.4 | length 44.7
  Top Layer w0.5: Q16.1 10.888,-97.379 12.483,-95.784 12.483,-67.552 18.05,-61.985 U2.4
EN15: Q15.1 U2.5 | length 49.2
  Top Layer w0.5: Q15.1 10.643,-101.479 13.377,-98.746 13.377,-67.882 18.469,-62.789 18.516,-62.789 19.32,-61.985 U2.5
GND: C1.1 C2.1 C3.2 C4.2 C5.2 C7.2 C8.1 C9.1 C10.2 C11.2 D1.7 DP1.3 FL2.1 IC1.7 IC1.18 IC1.21 IC1.25 IC1.26 J1.SH1 J1.SH2 P1.5 P1.11 P2.5 P2.11 P3.5 P3.11 R2.2 RT1.2 U1.14 U1.43 U2.12 U2.18 U2.19 | length 81.3
  Top Layer w0.3: C4.2 v1(12.535,-38.931) ; v1(36.2,-26.836) 36.229,-26.807 RT1.2 ; v1(36.712,-45.871) 37.127,-45.871 37.548,-45.45 IC1.18 ; v1(36.806,-42.782) 37.499,-43.476 38.663,-43.476 IC1.21 ; C7.2 v1(43.518,-45.275)
  Top Layer w0.5: P1.11@4.092,-53.146 4.331,-53.384 6.394,-53.384 10.701,-49.077 ; D1.7 11.388,-44.6 10.701,-45.287 10.701,-49.077 ; C11.2 11.625,-50 10.701,-49.077 ; v1(18.015,-39.126) C5.2 ; v1(27.85,-42.9) 27.9,-42.85 IC1.7 ; U2.12 v1(30.151,-61.349) ; C10.2 43.445,-43.903 v1(43.47,-43.928) ; v1(60.004,-24.214) 60.079,-24.139 C3.2 ; v1(61.229,-28.814) C1.1 ; C8.1 64.058,-43.769 v1(64.126,-43.837) 64.194,-43.769 C9.1 66.189,-44.326 FL2.1@67.274,-44.326 ; v1(66.136,-47.109) DP1.3 ; U1.14 v1(73.535,-12.324) ; R2.2 77.648,-37.382 79.098,-38.832 J1.SH1 81.759,-38.832 85.543,-42.615 85.543,-48.72 81.591,-52.672 J1.SH2 ; v1(89.131,-30.837) 89.135,-30.833 U1.43
  other v1: 21.247,-50.228 40.395,-40.617 77.665,-35.761 60.438,-21.169 59.462,-20.456
LED1: L1.2 U1.28 | length 10.7
  Top Layer w0.3: L1.2 67.412,-35.359 71.135,-31.636 U1.28
LED2: L2.2 U1.27 | length 13.6
  Top Layer w0.3: L2.2 62.19,-33.821 67.215,-33.821 69.935,-31.101 U1.27
NetC6_1: C6.1 FL2.2 J1.4 | length 4.8
  Top Layer w0.5: FL2.2 70.398,-45.175 J1.4@74.036,-45.175
NetC7_1: C7.1 IC1.17 | length 2.2
  Top Layer w0.3: IC1.17 39.678,-46.1 C7.1
NetIC1_22: IC1.22 L4.K | length 11.2
  Top Layer w0.3: IC1.22 47.009,-42.85 L4.K
NetIC1_23: IC1.23 L3.K | length 7.4
  Top Layer w0.3: IC1.23 44.159,-42.2 L3.K
NetL3_A: L3.A R1.1 | length 2.6
  Top Layer w0.3: R1.1 44.375,-36.659 L3.A
NetL4_A: L4.A R5.1 | length 2.8
  Top Layer w0.3: R5.1 47.425,-36.209 L4.A
NetR2_1: R2.1 W1.1 | length 3.6
  Top Layer w0.3: R2.1 W1.1
NetR4_1: R4.1 RT1.1 | length 7
  Top Layer w0.3: RT1.1 R4.1@43.264,-22.474
P2_0: U1.41 W1.2 | length 4
  Top Layer w0.3: W1.2 86.735,-31.166 U1.41
RST_N: P2.9 U1.13 | length 80.5
  Top Layer w0.3: P2.9 5.371,-23.867 12.346,-23.867 26.218,-9.994 73.871,-9.994 74.735,-10.858 U1.13
RTS: D1.3 P1.2 | length 7.2
  Top Layer w0.3: P1.2@6.632,-45.7 7.492,-45.7 11.191,-42.001 D1.3 D1.3
"RTS FT": D1.12 IC1.3 | length 13.9
  Top Layer w0.3: D1.12 24.325,-42 26.075,-40.25 IC1.3
RXD: D1.4 P1.3 | length 9.2
  Top Layer w0.3: P1.3@6.632,-48.24 7.615,-48.24 8.843,-47.012 8.843,-45.056 11.247,-42.652 12.33,-42.652 D1.4
"RXD FT": D1.11 IC1.5 | length 13.7
  Top Layer w0.3: D1.11 24.382,-42.65 25.482,-41.55 IC1.5
RY0: M1.16 M2.16 R6.1 | length 48.3
  Top Layer w0.5: R6.1 38.575,-79.447 M2.16
  Bottom Layer w0.5: M2.16 43.438,-84.31 74.255,-84.31 M1.16
RY1: M1.11 M2.11 R7.1 | length 48.5
  Top Layer w0.5: M2.11 27.228,-80.611 27.971,-79.867 R7.1
  Bottom Layer w0.5: M2.11 30.973,-77.055 61.32,-77.055 M1.11
RY2: M1.8 M2.8 R8.1 | length 77.7
  Top Layer w0.5: M2.8 43.95,-105.178 R8.1
  Bottom Layer w0.5: M2.8 43.259,-105.869 74.434,-105.869 M1.8
RY3: M1.13 M2.13 R9.1 | length 49.1
  Top Layer w0.5: M2.13 32.308,-80.611 33.004,-79.915 R9.1
  Bottom Layer w0.5: M2.13 34.569,-78.539 53.622,-78.539 58.238,-83.156 67.789,-83.156 M1.13
RY4: M1.1 M2.1 R10.1 | length 77.5
  Top Layer w0.5: R10.1 25.275,-78.082 23.405,-79.952 23.405,-107.943 M2.1 25.509,-112.561 56.624,-112.561 M1.1
RY5: M1.7 M2.7 R11.1 | length 78.2
  Top Layer w0.5: M2.7 41.25,-105.338 R11.1
  Bottom Layer w0.5: M2.7 38.962,-110.774 41.868,-110.774 46.013,-106.629 72.654,-106.629 M1.7
RY6: M1.2 M2.2 R12.1 | length 80.3
  Top Layer w0.5: R12.1 30.818,-73.725 30.818,-103.07 M2.2 27.349,-111.861 43.726,-111.861 48.852,-106.735 60.06,-106.735 M1.2
RY7: M1.5 M2.5 R13.1 | length 77.3
  Top Layer w0.5: M2.5 35.898,-105.61 35.898,-73.848 R13.1
  Bottom Layer w0.5: M2.5 35.194,-112.086 67.259,-112.086 M1.5
SYS_PWR: C3.1 L1.1 L2.1 U1.24 | length 17.9
  Top Layer w0.5: L2.1 62.757,-32.359 v1(62.846,-32.27) 62.935,-32.359 L1.1 ; C3.1@65.078,-24.052 v1(66.722,-24.052) 66.857,-24.052 67.216,-23.693 U1.24
  Bottom Layer w0.5: v1(62.846,-32.27) 66.722,-28.394 v1(66.722,-24.052)
TXD: D1.2 P1.1 | length 6.4
  Top Layer w0.3: P1.1@6.632,-43.16 9.19,-43.16 11,-41.35 D1.2
"TXD FT": D1.13 IC1.1 | length 14.2
  Top Layer w0.3: D1.13 23.481,-41.35 25.881,-38.95 IC1.1
UART_RX: P2.4 U1.20 | length 65.5
  Top Layer w0.3: P2.4 26.325,-27.686 35.118,-18.893 U1.20
UART_TX: P2.3 U1.19 | length 64.9
  Top Layer w0.3: P2.3 25.782,-25.146 33.235,-17.693 U1.19
Y0: P3.2 R6.2 | length 37.1
  Top Layer w0.3: R6.2 38.577,-71.773 v1(38.577,-69.641) v1@38.575,-69.643
  Bottom Layer w0.3: P3.2 9.941,-68.834 13.204,-65.571 34.508,-65.571 v1(38.577,-69.641)
Y1: P3.4 R7.2 | length 26.8
  Top Layer w0.3: R7.2 27.971,-69.681 v1(27.996,-69.656)
  Bottom Layer w0.3: P3.4 9.851,-73.914 16.194,-67.571 25.912,-67.571 v1(27.996,-69.656)
Y2: P3.1 R8.2 | length 42.2
  Top Layer w0.3: v1(43.945,-69.906) 43.945,-71.77 R8.2
  Bottom Layer w0.3: P3.1 8.433,-64.493 38.532,-64.493 v1(43.945,-69.906)
Y3: P3.3 R9.2 | length 31.7
  Top Layer w0.5: R9.2 33.022,-71.656 33.022,-69.709 v1(33.041,-69.69)
  Bottom Layer w0.3: P3.3 9.87,-71.374 14.673,-66.571 29.922,-66.571 v1(33.041,-69.69)
Y4: P3.10 R10.2 | length 27
  Top Layer w0.3: R10.2 v1(25.275,-69.762)
  Bottom Layer w0.3: P3.10 5.267,-75.089 9.383,-75.089 16.304,-68.168 23.681,-68.168 v1(25.275,-69.762)
Y5: P3.7 R11.2 | length 42.7
  Top Layer w0.3: R11.2 v1(41.25,-69.765)
  Bottom Layer w0.3: P3.7 5.361,-67.563 10.504,-67.563 12.997,-65.071 36.556,-65.071 v1(41.25,-69.765)
Y6: P3.9 R12.2 | length 32.4
  Top Layer w0.3: R12.2 30.671,-71.572 v1(30.671,-69.601)
  Bottom Layer w0.3: P3.9 5.267,-72.549 10.242,-72.549 15.72,-67.071 28.141,-67.071 v1(30.671,-69.601)
Y7: P3.8 R13.2 | length 37.4
  Top Layer w0.5: R13.2 v1(35.725,-69.656)
  Bottom Layer w0.3: P3.8 4.257,-68.834 4.257,-68.999 5.268,-70.01 9.942,-70.01 13.881,-66.071 32.14,-66.071 v1(35.725,-69.656)
pads on no net: D1.6 D1.9 IC1.2 IC1.6 IC1.8 IC1.9 IC1.10 IC1.12 IC1.13 IC1.14 IC1.19 IC1.24 IC1.27 IC1.28 J1.None U1.5 U1.6 U1.7 U1.8 U1.9 U1.10 U1.11 U1.12 U1.15 U1.16 U1.17 U1.18 U1.23 U1.29 U1.30 U1.31 U1.32 U1.33 U1.34 U1.35 U1.36 U1.37 U1.38 U1.39 U1.40 U1.42
copper on no net:
  other v2: 8.309,-118 81.681,-118 8.294,-3.885
  other v3: 81.681,-3.889

## Polygon pours and split planes (outlines as drawn)
GND on Bottom Layer "Ground" (solid, pour order 0): 0,-56.242 0,0 89.971,0 89.975,-0.004 89.975,-121.9 0.029,-121.9 0,-121.871

## Other copper
Top Layer:
  rectangle net "3.3 VCC": 63.694,-21.627 69.019,-19.737
  rectangle net GND: 20.294,-52.865 22.114,-49.38
  rectangle net GND: 37.998,-41.154 40.893,-40.077
  rectangle net GND: 58.883,-21.847 62.408,-19.947

## Silkscreen, mask and mechanical layers (free items; w line width, h text height)
Top Overlay:
  text "EPS BLE" at 1.716,-10.864 h1.5
Mechanical 4:
  lines w0.1: 0,-121.871 0.029,-121.9 89.975,-121.9 89.975,-12.275 89.975,-0.429 89.975,-0.229 89.975,-0.004 89.971,0 0,0 0,-0.217 0,-12.275 0,-12.725 0,-16.449 0,-16.65 0,-20.8 0,-33.048 0,-56.242 0,-95.775 0,-121.871 ; 70,-121.925 70,-121.925 ; 70,-95.7 70,-95.7